# Altium PCB Sensorboard.PcbDoc
Units mm, origin at the board's own origin, x right, y up, seen from the top; angles counter-clockwise.
Board outline 131 x 56 mm, 2 copper layers (Top Layer, Bottom Layer), stack 1.671 mm thick; 160 components, 86 nets, 430 pads, 72 vias.
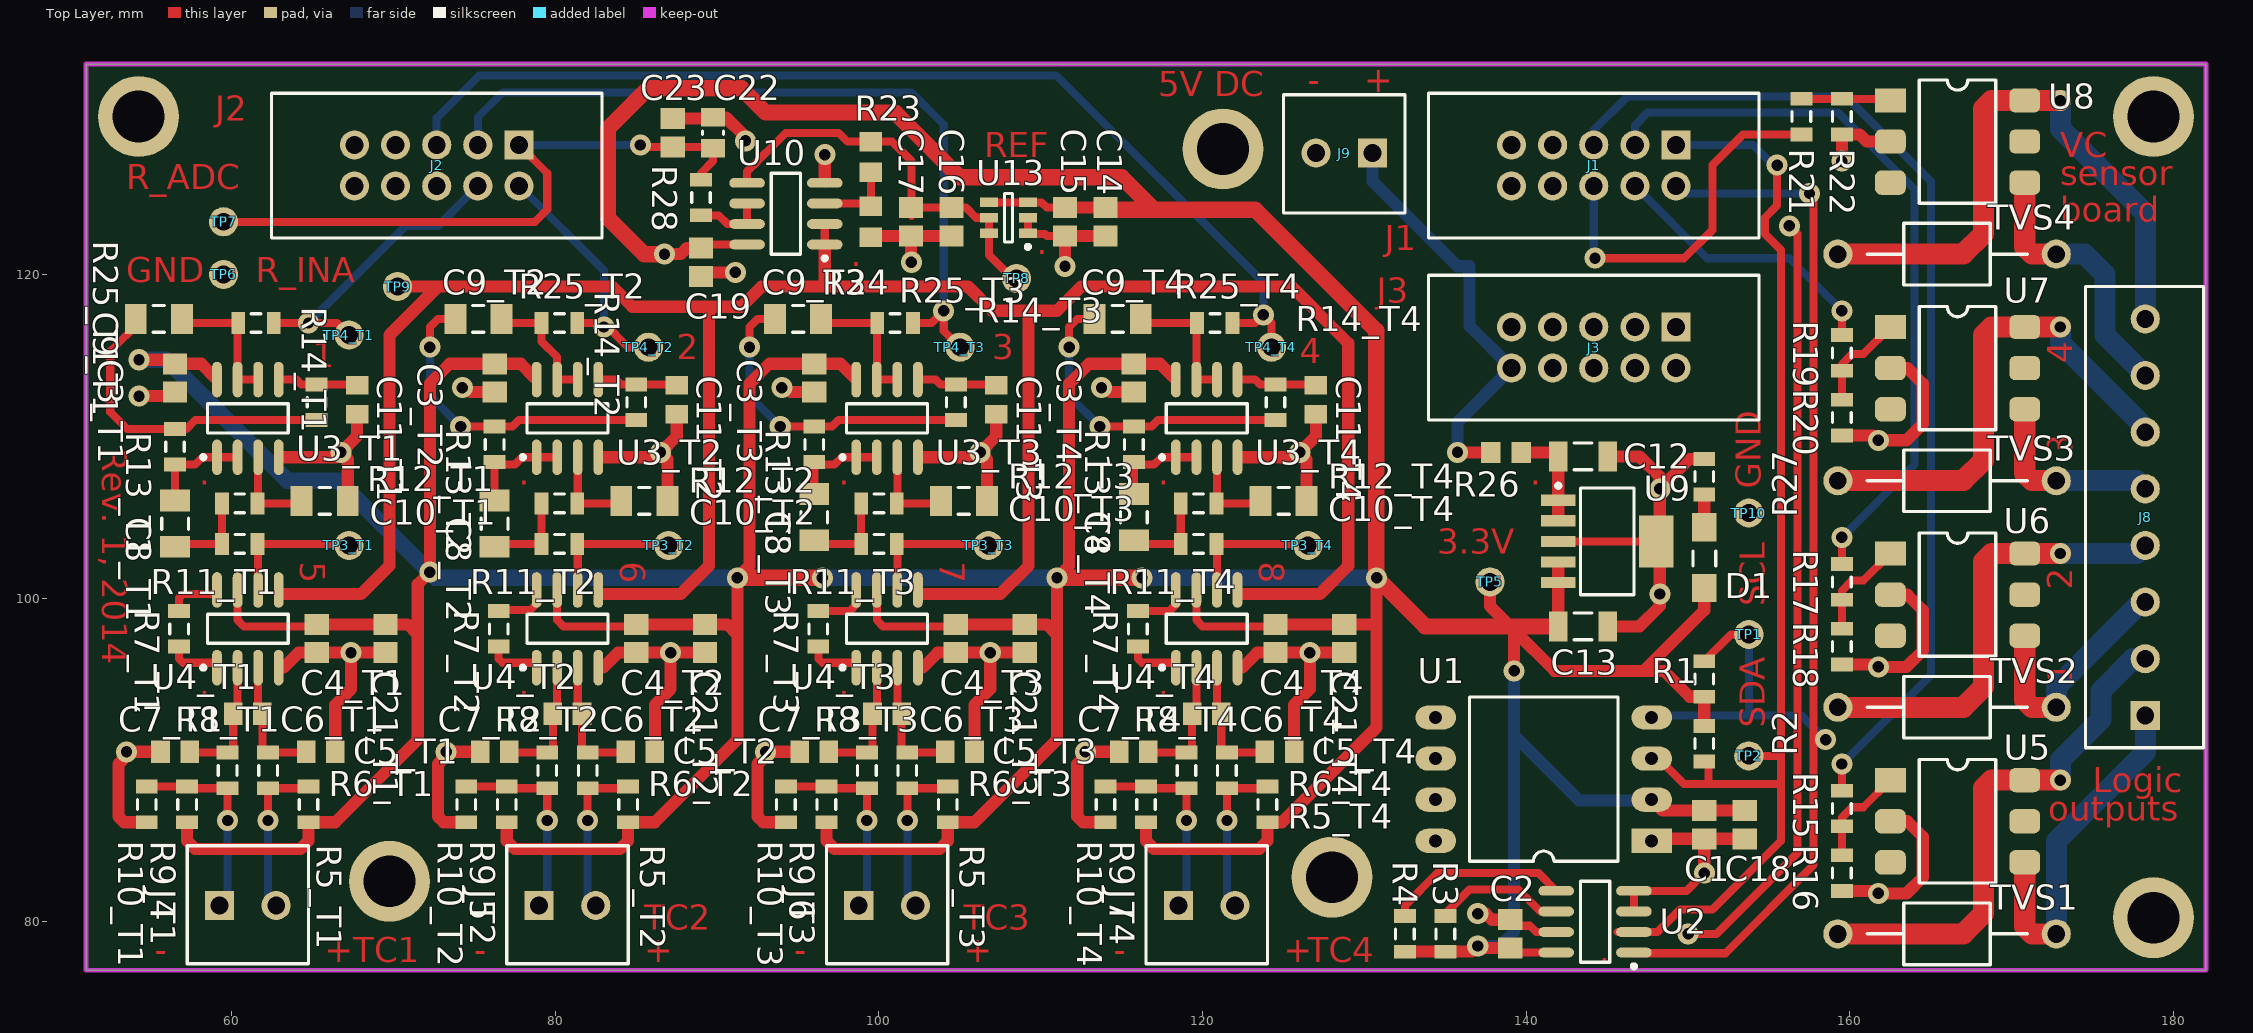
[diagram p0: Top Layer view]
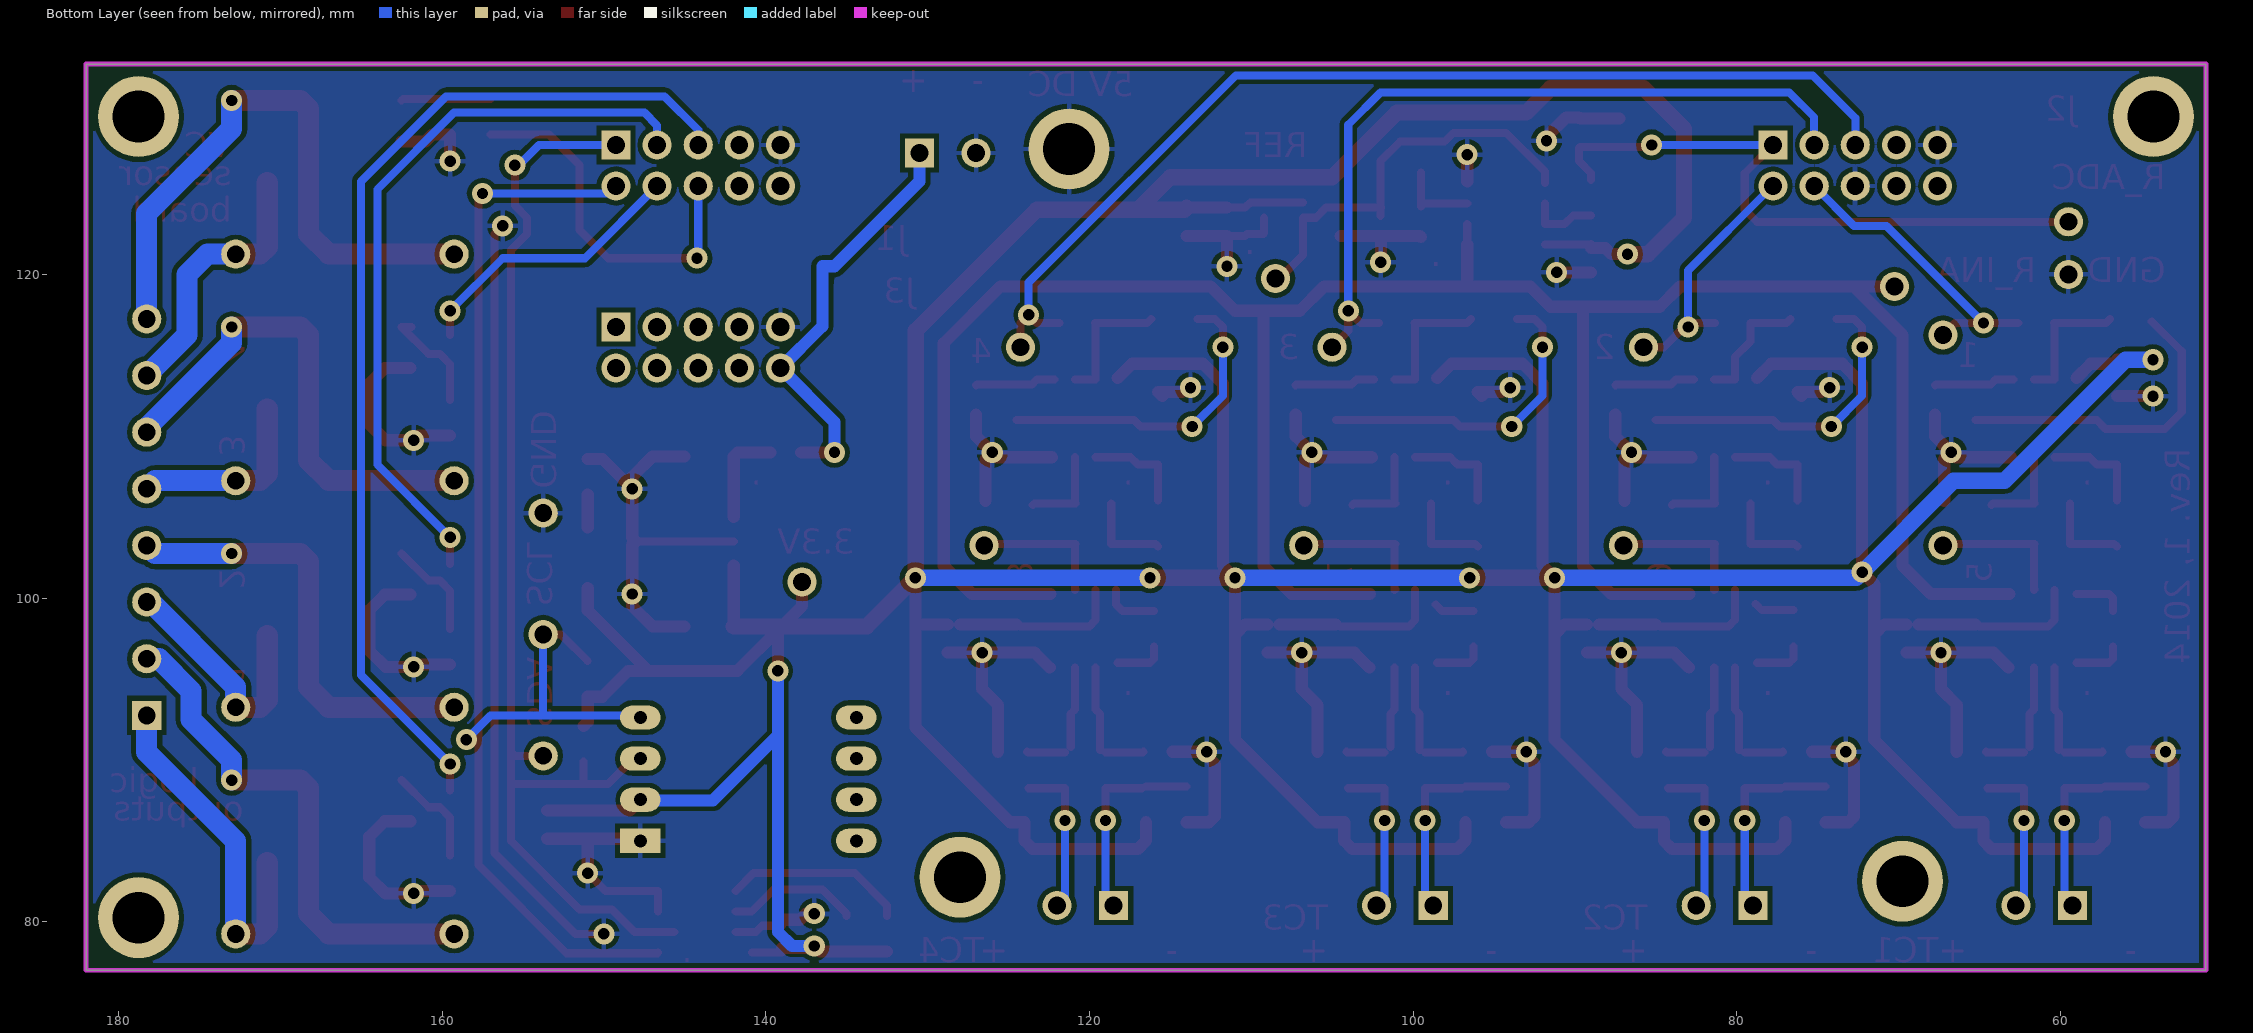
[diagram p1: Bottom Layer view, seen from below]

## Layer stack, top to bottom
Top Solder: solder mask 0.0102, Solder Resist, Dk 3.5
Top Layer: signal copper 0.0356
Dielectric 1: dielectric 1.6, FR-4, Dk 4.8
Bottom Layer: signal copper 0.0356
Bottom Solder: solder mask 0.0102, Solder Resist, Dk 3.5

## Board outline
51,77 51,133 182,133 182,77

## Design rules (kind name [scope] priority, off if disabled: settings)
Clearance "Groundplane clearance" [InNamedPolygon('Bottom Layer-GND')] p1: gap=0.3
Clearance "General clearance" [All] p2: gap=0.3
ComponentClearance ComponentClearance_2 [(InComponent('TP1') OR InComponent('TP2') OR InComponent('TP3_T1') OR InComponent('TP3_T2') OR InComponent('TP3_T3') OR InComponent('TP3_T4') OR InComponent('TP4_T1') OR InComponent('TP4_T2') OR InComponent('TP4_T3') OR InComponent('TP4_T4') OR InComponent('TP5') OR InComponent('TP6') OR InComponent('TP7') OR InComponent('TP8') OR InComponent('TP9') OR InComponent('TP10'))] p1: gap=0.5 collisioncheckmode=3 verticalgap=0.254 showdistances=FALSE
ComponentClearance [(InComponent('TVS1') OR InComponent('TVS2') OR InComponent('TVS3') OR InComponent('TVS4'))] p2: gap=0.1 collisioncheckmode=3 verticalgap=0.254 showdistances=FALSE
ComponentClearance ComponentClearance_1 [All] p3: gap=1 collisioncheckmode=3 verticalgap=0.254 showdistances=FALSE
HoleSize [All] p1: absolutevalues=TRUE maxlimit=3.2 minlimit=0.025 maxpercent=80.000 minpercent=20.000
PolygonConnect PolygonConnect_1 [All vs IsNamedPolygon('Bottom Layer-GND')] p1: connectstyle=Relief reliefconductorwidth=0.3 reliefentries=4 polygonreliefangle="90 Angle" airgapwidth=0.3
RoomDefinition T2 [(InComponentClass('T2') OR InComponent('J5'))] p1: confinementstyle=ConfineIn formatcopy=TRUE lockcomponents=FALSE outline 71.75,76.25 91.5,76.25 91.5,123.5 71.75,123.5
RoomDefinition T4 [(InComponentClass('T4') OR InComponent('J7'))] p2: confinementstyle=ConfineIn formatcopy=TRUE lockcomponents=FALSE outline 111.25,76.25 131,76.25 131,123.5 111.25,123.5
RoomDefinition T3 [(InComponentClass('T3') OR InComponent('J6'))] p3: confinementstyle=ConfineIn formatcopy=TRUE lockcomponents=FALSE outline 91.5,76.25 111.25,76.25 111.25,123.5 91.5,123.5
RoomDefinition T1 [(InComponentClass('T1') OR InComponent('J4'))] p4: confinementstyle=ConfineIn formatcopy=TRUE lockcomponents=FALSE outline 52,76.25 71.75,76.25 71.75,123.5 52,123.5
RoutingVias [All] p1: holewidth=0.7 width=1.3 viastyle="Through Hole" minholewidth=0.7 minwidth=1.3 maxholewidth=0.7 maxwidth=1.3
SolderMaskExpansion [All] p1: expansion=0.102
Width [All] p1: maxlimit=1.3 minlimit=0.5 preferedwidth=0.5 minimp=50.000000 maximp=50.000000 favimp=50.000000
27 further rules are at their usual default settings.

## Classes and differential pairs
channel class Temperature_Measurement: T1 T2 T3 T4
net class TEMP[1..4]: TEMP1 TEMP2 TEMP3 TEMP4
net class TC-[1..4]: TC-1 TC-2 TC-3 TC-4
net class TC+[1..4]: TC+1 TC+2 TC+3 TC+4
net class OUTC[1..4]: OUTC1 OUTC2 OUTC3 OUTC4
net class OUT-[1..4]: OUT-1 OUT-2 OUT-3 OUT-4
net class OUT+[1..4]: OUT+1 OUT+2 OUT+3 OUT+4
component class Xplained_Interface: J1 J2 J3 X2 X3 X4 X5 X6 X7
component class toplevel: J4 J5 J6 J7 J8 J9 X1
component class T4: C3_T4 C4_T4 C5_T4 C6_T4 C7_T4 C8_T4 C9_T4 C10_T4 C11_T4 C21_T4 R5_T4 R6_T4 R7_T4 R8_T4 R9_T4 R10_T4 R11_T4 R12_T4 R13_T4 R14_T4 R25_T4 TP3_T4 TP4_T4 U3_T4 U4_T4
component class T3: C3_T3 C4_T3 C5_T3 C6_T3 C7_T3 C8_T3 C9_T3 C10_T3 C11_T3 C21_T3 R5_T3 R6_T3 R7_T3 R8_T3 R9_T3 R10_T3 R11_T3 R12_T3 R13_T3 R14_T3 R25_T3 TP3_T3 TP4_T3 U3_T3 U4_T3
component class T2: C3_T2 C4_T2 C5_T2 C6_T2 C7_T2 C8_T2 C9_T2 C10_T2 C11_T2 C21_T2 R5_T2 R6_T2 R7_T2 R8_T2 R9_T2 R10_T2 R11_T2 R12_T2 R13_T2 R14_T2 R25_T2 TP3_T2 TP4_T2 U3_T2 U4_T2
component class T1: 3 C3_T1 C4_T1 C5_T1 C6_T1 C7_T1 C8_T1 C9_T1 C10_T1 C11_T1 C21_T1 R5_T1 R6_T1 R7_T1 R8_T1 R9_T1 R10_T1 R11_T1 R12_T1 R13_T1 R14_T1 R25_T1 TP3_T1 TP4_T1 U3_T1 U4_T1
component class Pressure_and_local_temp: C1 C2 C18 R1 R2 R3 R4 TP1 TP2 TP10 U1 U2
component class Power_System: C12 C13 C14 C15 C16 C17 C19 C22 C23 D1 R23 R24 R26 R27 R28 TP5 TP6 TP7 TP8 TP9 U9 U10 U13
component class Logic_Outputs: R15 R16 R17 R18 R19 R20 R21 R22 TVS1 TVS2 TVS3 TVS4 U5 U6 U7 U8

## Components (designator, comment, footprint, x,y, rotation, side; value= is the part's Value field where it differs from the comment)
C1 "C0805C104K5RACTU" "Cap Kemet 0805" 151,86 r90 top
C2 "C0805C104K5RACTU" "Cap Kemet 0805" 139,79.25 r270 top
C3_T1 "C0805C104K5RACTU" "Cap Kemet 0805" 56.5,113.6 r90 top (schematic designator C3)
C3_T2 "C0805C104K5RACTU" "Cap Kemet 0805" 76.25,113.6 r90 top (schematic designator C3)
C3_T3 "C0805C104K5RACTU" "Cap Kemet 0805" 96,113.6 r90 top (schematic designator C3)
C3_T4 "C0805C104K5RACTU" "Cap Kemet 0805" 115.75,113.6 r90 top (schematic designator C3)
C4_T1 "C0805C104K5RACTU" "Cap Kemet 0805" 65.25,97.5 r90 top (schematic designator C4)
C4_T2 "C0805C104K5RACTU" "Cap Kemet 0805" 85,97.5 r90 top (schematic designator C4)
C4_T3 "C0805C104K5RACTU" "Cap Kemet 0805" 104.75,97.5 r90 top (schematic designator C4)
C4_T4 "C0805C104K5RACTU" "Cap Kemet 0805" 124.5,97.5 r90 top (schematic designator C4)
C5_T1 "GRM2165C1H102JA01D" "CAP0805 murata" 65.5,90.5 r0 top (schematic designator C5)
C5_T2 "GRM2165C1H102JA01D" "CAP0805 murata" 85.25,90.5 r0 top (schematic designator C5)
C5_T3 "GRM2165C1H102JA01D" "CAP0805 murata" 105,90.5 r0 top (schematic designator C5)
C5_T4 "GRM2165C1H102JA01D" "CAP0805 murata" 124.75,90.5 r0 top (schematic designator C5)
C6_T1 "GRM21B5C1H223JA01L" "CAP0805 murata" 61,92.85 r0 top (schematic designator C6)
C6_T2 "GRM21B5C1H223JA01L" "CAP0805 murata" 80.75,92.85 r0 top (schematic designator C6)
C6_T3 "GRM21B5C1H223JA01L" "CAP0805 murata" 100.5,92.85 r0 top (schematic designator C6)
C6_T4 "GRM21B5C1H223JA01L" "CAP0805 murata" 120.25,92.85 r0 top (schematic designator C6)
C7_T1 "GRM2165C1H102JA01D" "CAP0805 murata" 56.5,90.5 r0 top (schematic designator C7)
C7_T2 "GRM2165C1H102JA01D" "CAP0805 murata" 76.25,90.5 r0 top (schematic designator C7)
C7_T3 "GRM2165C1H102JA01D" "CAP0805 murata" 96,90.5 r0 top (schematic designator C7)
C7_T4 "GRM2165C1H102JA01D" "CAP0805 murata" 115.75,90.5 r0 top (schematic designator C7)
C8_T1 "GRM31C5C1E104JA01L" "Cap1206 Murata" 56.5,104.6 r270 top (schematic designator C8)
C8_T2 "GRM31C5C1E104JA01L" "Cap1206 Murata" 76.25,104.6 r270 top (schematic designator C8)
C8_T3 "GRM31C5C1E104JA01L" "Cap1206 Murata" 96,105 r270 top (schematic designator C8)
C8_T4 "GRM31C5C1E104JA01L" "Cap1206 Murata" 115.75,105 r270 top (schematic designator C8)
C9_T1 "GRM31C5C1E104JA01L" "Cap1206 Murata" 55.5,117.25 r180 top (schematic designator C9)
C9_T2 "GRM31C5C1E104JA01L" "Cap1206 Murata" 75.25,117.25 r180 top (schematic designator C9)
C9_T3 "GRM31C5C1E104JA01L" "Cap1206 Murata" 95,117.25 r180 top (schematic designator C9)
C9_T4 "GRM31C5C1E104JA01L" "Cap1206 Murata" 114.75,117.25 r180 top (schematic designator C9)
C10_T1 "GRM31C5C1H823GA01L" "Cap1206 Murata" 65.75,106 r180 top (schematic designator C10)
C10_T2 "GRM31C5C1H823GA01L" "Cap1206 Murata" 85.5,106 r180 top (schematic designator C10)
C10_T3 "GRM31C5C1H823GA01L" "Cap1206 Murata" 105.25,106 r180 top (schematic designator C10)
C10_T4 "GRM31C5C1H823GA01L" "Cap1206 Murata" 125,106 r180 top (schematic designator C10)
C11_T1 "GRM2195C1H123JA01D" "CAP0805 murata" 67.75,112.25 r90 top (schematic designator C11)
C11_T2 "GRM2195C1H123JA01D" "CAP0805 murata" 87.5,112.25 r90 top (schematic designator C11)
C11_T3 "GRM2195C1H123JA01D" "CAP0805 murata" 107.25,112.25 r90 top (schematic designator C11)
C11_T4 "GRM2195C1H123JA01D" "CAP0805 murata" 127,112.25 r90 top (schematic designator C11)
C12 "C3216X7R1C106K160AC" "Cap TDK1206" 143.5,108.75 r180 top
C13 "C3216X7R1C106K160AC" "Cap TDK1206" 143.5,98.25 r180 top
C14 "C0805C105K4RACTU" "Cap Kemet 0805" 114,123.25 r90 top
C15 "C0805C104K5RACTU" "Cap Kemet 0805" 111.5,123.25 r90 top
C16 "C0805C104K5RACTU" "Cap Kemet 0805" 104.475,123.25 r90 top
C17 "C0805C105K4RACTU" "Cap Kemet 0805" 101.975,123.25 r90 top
C18 "C0805C105K4RACTU" "Cap Kemet 0805" 153.5,86 r90 top
C19 "C0805C104K5RACTU" "Cap Kemet 0805" 89,120.75 r90 top
C21_T1 "C0805C105K4RACTU" "Cap Kemet 0805" 69.5,97.5 r90 top (schematic designator C21)
C21_T2 "C0805C105K4RACTU" "Cap Kemet 0805" 89.25,97.5 r90 top (schematic designator C21)
C21_T3 "C0805C105K4RACTU" "Cap Kemet 0805" 109,97.5 r90 top (schematic designator C21)
C21_T4 "C0805C105K4RACTU" "Cap Kemet 0805" 128.75,97.5 r90 top (schematic designator C21)
C22 "C2012X7R1A475K125AC" "Cap TDK0805" 89.75,128.75 r270 top
C23 "C0805C104K5RACTU" "Cap Kemet 0805" 87.25,128.75 r270 top
D1 "KP-3216CGCK" "Diode Kingbright" 151,102.5 r90 top
J1 "T821110A1S100CEU" "Header 10P" 149.25,128 r270 top
J2 "T821110A1S100CEU" "Header 10P" 77.75,128 r270 top
J3 "T821110A1S100CEU" "Header 10P" 149.25,116.75 r270 top
J4 "1751248" "Terminalblock Pheonix 2P" 59.25,81 r90 top
J5 "1751248" "Terminalblock Pheonix 2P" 79,81 r90 top
J6 "1751248" "Terminalblock Pheonix 2P" 98.75,81 r90 top
J7 "1751248" "Terminalblock Pheonix 2P" 118.5,81 r90 top
J8 "1751303" "TERMINALBLOCK pheonix 8p" 178.25,92.75 r180 top
J9 "1751248" "Terminalblock Pheonix 2P" 130.5,127.5 r270 top
R1 "CRCW08054K70FKEB" "Res Vishay0805" 151,95 r270 top
R2 "CRCW08054K70FKEB" "Res Vishay0805" 151,91 r90 top
R3 "CRCW080510K0FKEB" "Res Vishay0805" 135,79.25 r270 top
R4 "CRCW080510K0FKEB" "Res Vishay0805" 132.5,79.25 r270 top
R5_T1 "CRCW080510M0FKEA" "Res Vishay0805" 64.75,87.25 r270 top (schematic designator R5)
R5_T2 "CRCW080510M0FKEA" "Res Vishay0805" 84.5,87.25 r270 top (schematic designator R5)
R5_T3 "CRCW080510M0FKEA" "Res Vishay0805" 104.25,87.25 r270 top (schematic designator R5)
R5_T4 "CRCW080510M0FKEA" "Res Vishay0805" 124,87.25 r270 top (schematic designator R5)
R6_T1 "CRCW080510K0FKEB" "Res Vishay0805" 62.25,89.35 r90 top (schematic designator R6)
R6_T2 "CRCW080510K0FKEB" "Res Vishay0805" 82,89.35 r90 top (schematic designator R6)
R6_T3 "CRCW080510K0FKEB" "Res Vishay0805" 101.75,89.35 r90 top (schematic designator R6)
R6_T4 "CRCW080510K0FKEB" "Res Vishay0805" 121.5,89.35 r90 top (schematic designator R6)
R7_T1 "CRCW0805442RFKEA" "Res Vishay0805" 56.75,98.1 r90 top (schematic designator R7)
R7_T2 "CRCW0805442RFKEA" "Res Vishay0805" 76.5,98.1 r90 top (schematic designator R7)
R7_T3 "CRCW0805442RFKEA" "Res Vishay0805" 96.25,98.1 r90 top (schematic designator R7)
R7_T4 "CRCW0805442RFKEA" "Res Vishay0805" 116,98.1 r90 top (schematic designator R7)
R8_T1 "CRCW080510K0FKEB" "Res Vishay0805" 59.75,89.35 r90 top (schematic designator R8)
R8_T2 "CRCW080510K0FKEB" "Res Vishay0805" 79.5,89.35 r90 top (schematic designator R8)
R8_T3 "CRCW080510K0FKEB" "Res Vishay0805" 99.25,89.35 r90 top (schematic designator R8)
R8_T4 "CRCW080510K0FKEB" "Res Vishay0805" 119,89.35 r90 top (schematic designator R8)
R9_T1 "CRCW080522K6FKEA" "Res Vishay0805" 57.25,87.25 r270 top (schematic designator R9)
R9_T2 "CRCW080522K6FKEA" "Res Vishay0805" 77,87.25 r270 top (schematic designator R9)
R9_T3 "CRCW080522K6FKEA" "Res Vishay0805" 96.75,87.25 r270 top (schematic designator R9)
R9_T4 "CRCW080522K6FKEA" "Res Vishay0805" 116.5,87.25 r270 top (schematic designator R9)
R10_T1 "CRCW080510K0FKEB" "Res Vishay0805" 54.75,87.25 r90 top (schematic designator R10)
R10_T2 "CRCW080510K0FKEB" "Res Vishay0805" 74.5,87.25 r90 top (schematic designator R10)
R10_T3 "CRCW080510K0FKEB" "Res Vishay0805" 94.25,87.25 r90 top (schematic designator R10)
R10_T4 "CRCW080510K0FKEB" "Res Vishay0805" 114,87.25 r90 top (schematic designator R10)
R11_T1 "CRCW0805133KFKEA" "Res Vishay0805" 60.5,103.35 r180 top (schematic designator R11)
R11_T2 "CRCW0805133KFKEA" "Res Vishay0805" 80.25,103.35 r180 top (schematic designator R11)
R11_T3 "CRCW0805133KFKEA" "Res Vishay0805" 100,103.35 r180 top (schematic designator R11)
R11_T4 "CRCW0805133KFKEA" "Res Vishay0805" 119.75,103.35 r180 top (schematic designator R11)
R12_T1 "CRCW0805215KFKEA" "Res Vishay0805" 60.5,105.85 r0 top (schematic designator R12)
R12_T2 "CRCW0805215KFKEA" "Res Vishay0805" 80.25,105.85 r0 top (schematic designator R12)
R12_T3 "CRCW0805215KFKEA" "Res Vishay0805" 100,105.85 r0 top (schematic designator R12)
R12_T4 "CRCW0805215KFKEA" "Res Vishay0805" 119.75,105.85 r0 top (schematic designator R12)
R13_T1 "CRCW0805294KFKEA" "Res Vishay0805" 56.5,109.35 r90 top (schematic designator R13)
R13_T2 "CRCW0805294KFKEA" "Res Vishay0805" 76.25,109.5 r90 top (schematic designator R13)
R13_T3 "CRCW0805294KFKEA" "Res Vishay0805" 96,109.5 r90 top (schematic designator R13)
R13_T4 "CRCW0805294KFKEA" "Res Vishay0805" 115.75,109.5 r90 top (schematic designator R13)
R14_T1 "CRCW0805715KFKEA" "Res Vishay0805" 65.25,112.1 r90 top (schematic designator R14)
R14_T2 "CRCW0805715KFKEA" "Res Vishay0805" 85,112.1 r90 top (schematic designator R14)
R14_T3 "CRCW0805715KFKEA" "Res Vishay0805" 104.75,112.1 r90 top (schematic designator R14)
R14_T4 "CRCW0805715KFKEA" "Res Vishay0805" 124.5,112.1 r90 top (schematic designator R14)
R15 "CRCW0805300RFKEA" "Res Vishay0805" 159.5,87 r270 top
R16 "CRCW080510K0FKEB" "Res Vishay0805" 159.5,83 r90 top
R17 "CRCW0805300RFKEA" "Res Vishay0805" 159.5,101 r270 top
R18 "CRCW080510K0FKEB" "Res Vishay0805" 159.5,97 r90 top
R19 "CRCW0805300RFKEA" "Res Vishay0805" 159.5,115.15 r270 top
R20 "CRCW080510K0FKEB" "Res Vishay0805" 159.5,111.15 r90 top
R21 "CRCW0805300RFKEA" "Res Vishay0805" 157,129.75 r90 top
R22 "CRCW080510K0FKEB" "Res Vishay0805" 159.5,129.75 r90 top
R23 "RG2012P-4022-B-T5" "RES SSM 0805" 99.5,127.25 r90 top
R24 "RG2012P-103-B-T5" "RES SSM 0805" 99.5,123.25 r90 top
R25_T1 "CRCW08050000Z0EA" "Res Vishay0805" 61.5,117 r0 top (schematic designator R25)
R25_T2 "CRCW08050000Z0EA" "Res Vishay0805" 80.25,117 r0 top (schematic designator R25)
R25_T3 "CRCW08050000Z0EA" "Res Vishay0805" 101,117 r0 top (schematic designator R25)
R25_T4 "CRCW08050000Z0EA" "Res Vishay0805" 120.75,117 r0 top (schematic designator R25)
R26 "ERJ-6RSFR10V" "Res panasonic0805" 138.75,109 r0 top
R27 "CRCW0805220RFKEA" "Res Vishay0805" 151,107.5 r270 top
R28 "CRCW080520R0FKEA" "Res Vishay0805" 89,124.75 r90 top
TP1 "Test_point" Testpoint 153.75,97.75 r0 top
TP2 "Test_point" Testpoint 153.75,90.25 r90 top
TP3_T1 "Test_point" Testpoint 67.25,103.25 r90 top (schematic designator TP3)
TP3_T2 "Test_point" Testpoint 87,103.25 r90 top (schematic designator TP3)
TP3_T3 "Test_point" Testpoint 106.75,103.25 r90 top (schematic designator TP3)
TP3_T4 "Test_point" Testpoint 126.5,103.25 r90 top (schematic designator TP3)
TP4_T1 "Test_point" Testpoint 67.25,116.25 r90 top (schematic designator TP4)
TP4_T2 "Test_point" Testpoint 85.75,115.5 r90 top (schematic designator TP4)
TP4_T3 "Test_point" Testpoint 105,115.5 r90 top (schematic designator TP4)
TP4_T4 "Test_point" Testpoint 124.25,115.5 r90 top (schematic designator TP4)
TP5 "Test_point" Testpoint 137.75,101 r90 top
TP6 "Test_point" Testpoint 59.5,120 r90 top
TP7 "Test_point" Testpoint 59.5,123.25 r90 top
TP8 "Test_point" Testpoint 108.5,119.75 r90 top
TP9 "Test_point" Testpoint 70.25,119.25 r90 top
TP10 "Test_point" Testpoint 153.75,105.25 r90 top
TVS1 "SA36CA-E3/54" "Diode Vishay" 159.25,79.25 r0 top
TVS2 "SA36CA-E3/54" "Diode Vishay" 159.25,93.25 r0 top
TVS3 "SA36CA-E3/54" "Diode Vishay" 159.25,107.25 r0 top
TVS4 "SA36CA-E3/54" "Diode Vishay" 159.25,121.25 r0 top
U1 "HSCDANN015PA2A3" "HSCDANN015PA2A3 Pressure sensor" 147.75,85 r180 top
U2 "ADT7410TRZ" ADT7410 144.25,80 r180 top
U3_T1 "LMP7702MA/NOPB" OPA2333AIDR 61,111.1 r90 top (schematic designator U3)
U3_T2 "LMP7702MA/NOPB" OPA2333AIDR 80.75,111.1 r90 top (schematic designator U3)
U3_T3 "LMP7702MA/NOPB" OPA2333AIDR 100.5,111.1 r90 top (schematic designator U3)
U3_T4 "LMP7702MA/NOPB" OPA2333AIDR 120.25,111.1 r90 top (schematic designator U3)
U4_T1 "AD623BRZ" AD623 61,98.1 r90 top (schematic designator U4)
U4_T2 "AD623BRZ" AD623 80.75,98.1 r90 top (schematic designator U4)
U4_T3 "AD623BRZ" AD623 100.5,98.1 r90 top (schematic designator U4)
U4_T4 "AD623BRZ" AD623 120.25,98.1 r90 top (schematic designator U4)
U5 "AQV252GA" "AQV252GA Panasonic" 162.5,88.75 r0 top
U6 "AQV252GA" "AQV252GA Panasonic" 162.5,102.75 r0 top
U7 "AQV252GA" "AQV252GA Panasonic" 162.5,116.75 r0 top
U8 "AQV252GA" "AQV252GA Panasonic" 162.5,130.75 r0 top
U9 "TPS7A4533DCQ" TPS7A4533DCQ 145,103.5 r0 top
U10 "LMP7702MA/NOPB" OPA2333AIDR 94.25,123.75 r180 top
U13 "ADR3425ARJZ" ADR3425 108,123.5 r180 top

## Footprints (in the part's own frame and the unit in brackets; to place one, negate y for a bottom-side part, rotate by r counter-clockwise, add the part's x,y. Pads: shape width x height; smd on the part's side, far side on the other; paste and mask are expansions set on the pad)
AD623 [mm] "SOIC, 8-Leads, Body 4,90x3,90mm, Pitch 1,27mm, IPC Medium Density"
  oval 2.2x0.6 smd: 1(-2.4,1.905) 2(-2.4,0.635) 3(-2.4,-0.635) 4(-2.4,-1.905) 5(2.4,-1.905) 6(2.4,-0.635) 7(2.4,0.635) 8(2.4,1.905)
  silkscreen extent -2.52,-2.5 0.9,2.88, body extent -2,-2.5 2,2.5, height 1.75
ADR3425 [mm] "SOT23, 6-Leads, Body 2,90x2,80mm, Pitch 0,95mm, IPC Medium Density"
  rect 1.1x0.6 smd: 1(-1.2,0.95) 2(-1.2,0) 3(-1.2,-0.95) 4(1.2,-0.95) 5(1.2,0) 6(1.2,0.95)
  silkscreen extent -1.33,-1.5 0.25,1.92, body extent -0.85,-1.5 0.85,1.5, height 1.45
ADT7410 [mm] "SOIC, Pitch = 1.27mm"
  oval 2.2x0.6 smd: 1(-2.4,1.905) 2(-2.4,0.635) 3(-2.4,-0.635) 4(-2.4,-1.905) 5(2.4,-1.905) 6(2.4,-0.635) 7(2.4,0.635) 8(2.4,1.905)
  silkscreen extent -2.53,-2.5 0.9,2.88, body extent -2,-2.5 2,2.5, height 1.75
"AQV252GA Panasonic" [mm]
  rect 1.9x1.5 smd: 1(0,0)
  rrect50% 1.9x1.5 smd: 2(0,-2.54) 3(0,-5.08) 4(8.3,-5.08) 5(8.3,-2.54) 6(8.3,0)
  silkscreen extent 1.78,-6.35 6.52,1.27
"CAP0805 murata" [mm] "Chip Capacitor, 2-Leads, Body 2,00x1,25mm, IPC Medium Density"
  rect 1.15x1.4 smd: 1(-0.9,0) 2(0.9,0)
  body extent -1.05,-0.67 1.05,0.67, height 0.7
"Cap1206 Murata" [mm]
  rect 1.35x1.85 smd: 1(-1.425,0) 2(1.425,0)
  silkscreen extent -0.35,-0.82 0.35,0.82, body extent -1.7,-0.9 1.7,0.9, height 1.8
"Cap Kemet 0805" [mm]
  rect 1.3x1.5 smd: 1(-0.875,0) 2(0.875,0)
  body extent -1.1,-0.72 1.1,0.72, height 0.88
"Cap TDK0805" [mm]
  rect 1.15x1.5 smd: 1(-0.95,0) 2(0.95,0)
  silkscreen extent -0.1,-0.65 0.1,0.65, body extent -1.1,-0.72 1.1,0.72, height 1.45
"Cap TDK1206" [mm]
  rect 1.15x1.85 smd: 1(-1.525,0) 2(1.525,0)
  silkscreen extent -0.55,-0.82 0.55,0.82, body extent -1.7,-0.9 1.7,0.9, height 1.8
"Diode Kingbright" [mm]
  rect 1.75x1.5 smd: A(-1.875,0) K(1.875,0)
  silkscreen extent -0.5,-0.7 0.4,0.7
"Diode Vishay" [mm]
  round 1.8 hole 1.1: A(0,0) K(13.5,0)
  silkscreen extent 1.8,-1.91 11.7,1.91
"Header 10P" [mm]
  rect 1.8x1.8 hole 1.1: 1(0,0)
  round 1.8 hole 1.1: 2(2.54,0) 3(0,-2.54) 4(2.54,-2.54) 5(0,-5.08) 6(2.54,-5.08) 7(0,-7.62) 8(2.54,-7.62) 9(0,-10.16) 10(2.54,-10.16)
  silkscreen extent -3.2,-15.29 5.74,5.13
"HSCDANN015PA2A3 Pressure sensor" [mm]
  rect 2.5x1.5 hole 0.8: 1(0,0)
  oval 2.5x1.5 hole 0.8: 2(0,-2.54) 3(0,-5.08) 4(0,-7.62) 5(13.35,-7.62) 6(13.35,-5.08) 7(13.35,-2.54) 8(13.35,0)
  silkscreen extent 2.08,-8.89 11.27,1.27
OPA2333AIDR [mm] "SOIC pitch=1.27mm"
  oval 2.2x0.6 smd: 1(-2.4,1.905) 2(-2.4,0.635) 3(-2.4,-0.635) 4(-2.4,-1.905) 5(2.4,-1.905) 6(2.4,-0.635) 7(2.4,0.635) 8(2.4,1.905)
  silkscreen extent -2.52,-2.5 0.9,2.88, body extent -2,-2.5 2,2.5, height 1.75
"Res panasonic0805" [mm]
  rect 1.2x1.3 smd: 1(-0.95,0) 2(0.95,0)
  body extent -1.1,-0.67 1.1,0.68, height 0.7
"RES SSM 0805" [mm]
  rect 1.2x1.4 smd: 1(-0.95,0) 2(0.95,0)
  body extent -1.1,-0.72 1.1,0.73, height 0.5
"Res Vishay0805" [mm]
  rect 0.85x1.35 smd: 1(-1.1,0) 2(1.1,0)
  silkscreen extent -0.3,-0.58 0.3,0.58, body extent -1.1,-0.7 1.1,0.7, height 0.5
"Terminalblock Pheonix 2P" [mm]
  rect 1.8x1.8 hole 1.1: 1(0,0)
  round 1.8 hole 1.1: 2(0,-3.5)
  silkscreen extent -3.6,-5.5 3.7,2
"TERMINALBLOCK pheonix 8p" [mm]
  rect 1.8x1.8 hole 1.1: 1(0,0)
  round 1.8 hole 1.1: 2(0,-3.5) 3(0,-7) 4(0,-10.5) 5(0,-14) 6(0,-17.5) 7(0,-21) 8(0,-24.5)
  silkscreen extent -3.6,-26.5 3.7,2
Testpoint [mm]
  round 1.8 hole 1.1: 1(0,0)
TPS7A4533DCQ [mm] "SOT223, 6-Leads, Body 6,50x7,06mm (avg), Pitch 1,27mm, IPC Medium Density"
  rect 2.15x0.7 smd: 1(-3.025,2.54) 2(-3.025,1.27) 3(-3.025,0) 4(-3.025,-1.27) 5(-3.025,-2.54)
  rect 2.15x3.2 smd: 6(3.025,0)
  silkscreen extent -3.15,-3.3 1.65,3.56, body extent -1.78,-3.27 1.78,3.27, height 1.8

## Part data
C1 C2 C3_T1 C3_T2 C3_T3 C3_T4 C4_T1 C4_T2 C4_T3 C4_T4 C15 C16 C19 C23: "Ceramic capacitor, X7R, 10%, 50V"
C5_T1 C5_T2 C5_T3 C5_T4 C6_T1 C6_T2 C6_T3 C6_T4 C7_T1 C7_T2 C7_T3 C7_T4 C11_T1 C11_T2 C11_T3 C11_T4: "Ceramic capacitor, C0G, 5%, 50V"
C8_T1 C8_T2 C8_T3 C8_T4 C9_T1 C9_T2 C9_T3 C9_T4: "Ceramic capacitor, C0G, 5%, 25V"
C10_T1 C10_T2 C10_T3 C10_T4: "Ceramic capacitor, C0G, 2%, 50V"
C12 C13 C14 C17 C18 C21_T1 C21_T2 C21_T3 C21_T4: "Ceramic capacitor, X7R, 10%, 16V"
C22: "Ceramic capacitor, X7R, 10%, 10V"
D1: "Chip led lamp,green, 50mcd @ 20mA"
J1 J2 J3: "Header, 2x5, 2.54mm"
J4 J5 J6 J7 J9: "Terminal block, 2P, 3.5mm, screw"
J8: "Terminal block, 8P, 3.5mm, screw"
R1 R2 R3 R4 R5_T1 R5_T2 R5_T3 R5_T4 R6_T1 R6_T2 R6_T3 R6_T4 R7_T1 R7_T2 R7_T3 R7_T4 R8_T1 R8_T2 R8_T3 R8_T4 R9_T1 R9_T2 R9_T3 R9_T4 R10_T1 R10_T2 R10_T3 R10_T4 R11_T1 R11_T2 R11_T3 R11_T4 R12_T1 R12_T2 R12_T3 R12_T4 R13_T1 R13_T2 R13_T3 R13_T4 R14_T1 R14_T2 R14_T3 R14_T4 R15 R16 R17 R18 R19 R20 R21 R22 R25_T1 R25_T2 R25_T3 R25_T4 R26 R27 R28: "Thick film resistor, 1%, 125mW"
R23 R24: "Thin film resistor, 0.1%, 100mW"
TVS1 TVS2 TVS3 TVS4: "TVS diode, bidirectional, 36 V"
U1: "Absolute pressure sensor, I2C output"
U2: "Temperature sensor, I2C output"
U3_T1 U3_T2 U3_T3 U3_T4 U10: "Op. amp, dual, rail-to-rail, single supply"
U4_T1 U4_T2 U4_T3 U4_T4: "Instrumentation amplifier, rail to rail"
U5 U6 U7 U8: "Solid state relay, DC/AC, 60V, 2.5A"
U9: "LDO regulator, 3.3V, 1.5A"
U13: "Series voltage reference, 2.5V"

## Free pads (board coordinates)
  round 5 hole 3.2: 0(54.25,129.75) 0(69.75,82.5) 0(121.25,127.75) 0(128,82.75) 0(178.75,80.25) 0(178.75,129.75)

## Via types
v1: diameter 1.3, hole 0.7, Top Layer to Bottom Layer, 72 vias

## Nets (pads, with @x,y where several pads share a name; then routed paths per layer and width w, separated by ;. In a path a pad name is that pad's centre, name@x,y a point inside that pad or via, vN(x,y) a via of type N, cw(c..) or ccw(c..) an arc to the next point about the centre after c; other vN are vias at no path point)
3.3V: C1.2 C2.2 C3_T1.2 C3_T2.2 C3_T3.2 C3_T4.2 C4_T1.2 C4_T2.2 C4_T3.2 C4_T4.2 C13.2 C14.2 C15.2 C18.2 C19.2 C21_T1.2 C21_T2.2 C21_T3.2 C21_T4.2 D1.A R1.2 R2.2 R3.2 R4.2 R5_T1.2 R5_T2.2 R5_T3.2 R5_T4.2 R9_T1.2 R9_T2.2 R9_T3.2 R9_T4.2 TP5.1 U1.2 U2.8 U3_T1.8 U3_T2.8 U3_T3.8 U3_T4.8 U4_T1.7 U4_T2.7 U4_T3.7 U4_T4.7 U9.4 U9.5 U10.8 U13.3 U13.4 | length 495.8
  Top Layer w0.5: U4_T1.7 60.365,98.635 60.75,98.25 C4_T1.2@65,98.25 ; U4_T2.7 80.115,98.635 80.5,98.25 C4_T2.2@84.75,98.25 ; C19.2@89,121.875 89.03,121.845 U10.8 ; U4_T3.7 99.865,98.635 100.25,98.25 C4_T3.2@104.5,98.25 ; U13.4 U13.3 110.05,124.45 110.375,124.125 C15.2 ; U4_T4.7 119.615,98.635 120,98.25 C4_T4.2@124.25,98.25 ; C2.2@139,78.095 U2.8@140.85,78.095 ; 140,98.25 140.25,98.25
  Top Layer w0.75: v1(54.275,114.725) C3_T1.2@56.5,114.725 ; C3_T1.2@56.775,114.5 C3_T1.2 58.12,114.475 U3_T1.8@59,113.595 ; R9_T1.2 57.25,85 57.75,84.5 64.25,84.5 64.75,85 R5_T1.2 66.4,86.15 71.5,91.25 71.5,97.75 ; C4_T1.2 68.75,98.375 ; C21_T1.2 70.875,98.375 71.5,97.75 ; R9_T2.2 77,85 77.5,84.5 84,84.5 84.5,85 R5_T2.2 86.15,86.15 91.25,91.25 91.25,97.75 ; U3_T2.8@78.75,113.595 77.87,114.475 C3_T2.2 73.475,114.475 72.25,113.25 v1(72.25,101.6) 71.5,100.85 71.5,97.75 ; C4_T2.2 88.5,98.375 ; v1(86.75,121.25) 87.75,121.25 88.125,121.625 C19.2 ; C21_T2.2 90.625,98.375 91.25,97.75 ; R9_T3.2 96.75,85 97.25,84.5 103.75,84.5 104.25,85 R5_T3.2 105.9,86.15 111,91.25 111,97.75 ; U3_T3.8@98.5,113.595 97.62,114.475 C3_T3.2 93.225,114.475 92,113.25 92,102 v1(91.25,101.25) 91.25,97.75 ; C4_T3.2 108.25,98.375 ; C21_T3.2 110.375,98.375 111,97.75 ; C15.2 C14.2 ; R9_T4.2 116.5,85 117,84.5 123.5,84.5 124,85 R5_T4.2 124.9,86.15 130.75,92 130.75,98.5 ; U3_T4.8@118.25,113.595 117.37,114.475 C3_T4.2 112.975,114.475 111.75,113.25 111.75,102 v1(111,101.25) 111,97.75 ; C4_T4.2 128,98.375 ; C21_T4.2 130.625,98.375 130.75,98.5 ; v1(130.75,101.25) 130.75,98.5 ; R4.2 R3.2 136.65,78.15 v1(137,78.5) 137.125,78.375 C2.2 ; TP5.1 137.75,99.5 139,98.25 139.25,98 ; v1(139.25,95.5) 139.25,98 ; C13.2 U9.5 U9.4@141.975,102 ; U1.2 148.415,86.875 C1.2 C18.2 ; D1.A 151,99.25 147.25,95.5 ; R2.2@151.25,92.1 151,92.35 R1.2 150.1,93.9 148.5,95.5 147.25,95.5 ; 139.25,98 141.75,95.5 147.25,95.5
  Top Layer w1: v1(86.75,121.25) 85.5,121.25 83.25,123.5 83.25,129 85.75,131.5 91.5,131.5 93,130 101,130 105,126 115,126 117,124 ; v1(91.25,101.25) v1(96.5,101.25) ; v1(111,101.25) v1(116.25,101.25) ; C14.2 114.125,124 117,124 ; C13.2 140.25,98.25 140,98.25 139,98.25 133.75,98.25 v1(130.75,101.25) 130.725,101.275 130.725,116.525 123.25,124 117,124
  Bottom Layer w0.75: v1(72.25,101.6) v1@72.35,101.5 ; v1@137,78.25 v1(137,78.5) 138.375,78.5 139.25,79.375 139.25,91.5 ; v1(139.25,95.5) 139.25,91.5 ; U1.2@147.75,87.29 147.54,87.5 143.25,87.5 139.25,91.5
  Bottom Layer w1: v1(54.275,114.725) 55.975,114.725 63.45,107.25 66.6,107.25 v1(72.25,101.6) ; v1@72.35,101.5 72.6,101.25 v1(91.25,101.25) ; v1(96.5,101.25) v1(111,101.25) ; v1(116.25,101.25) v1(130.75,101.25)
GND: C1.1 C2.1 C3_T1.1 C3_T2.1 C3_T3.1 C3_T4.1 C4_T1.1 C4_T2.1 C4_T3.1 C4_T4.1 C5_T1.2 C5_T2.2 C5_T3.2 C5_T4.2 C7_T1.1 C7_T2.1 C7_T3.1 C7_T4.1 C10_T1.1 C10_T2.1 C10_T3.1 C10_T4.1 C11_T1.1 C11_T2.1 C11_T3.1 C11_T4.1 C12.1 C13.1 C14.1 C15.1 C16.1 C17.1 C18.1 C19.1 C21_T1.1 C21_T2.1 C21_T3.1 C21_T4.1 C22.1 C23.1 J1.9 J2.6 J2.9 J3.9 J9.2 pad.0@121.25,127.75 R10_T1.1 R10_T2.1 R10_T3.1 R10_T4.1 R16.1 R18.1 R20.1 R22.1 R24.1 R27.1 TP6.1 TP10.1 U1.1 U2.3 U2.4 U2.7 U3_T1.4 U3_T2.4 U3_T3.4 U3_T4.4 U4_T1.4 U4_T2.4 U4_T3.4 U4_T4.4 U5.2 U6.2 U7.2 U8.2 U9.3 U9.6 U10.4 U13.1 U13.2 | length 284.6
  Top Layer w0.5: U13.2 U13.1 109.25,122.5 110.25,122.5 110.375,122.375 C15.1 ; C2.1@139,79.75 140.23,79.75 140.615,79.365 U2.7 ; U9.3 U9.6 ; U2.3 U2.4 149.905,81.905 v1(151,83) ; v1@150.25,79.25 151.75,79.25 156.75,84.25 156.75,122.5 v1(156.25,123)
  Top Layer w0.75: v1(53.5,90.5) 53.5,90.25 53,89.75 53,86.5 53.35,86.15 R10_T1.1 ; v1@53.75,90.5 C7_T1.1 ; v1(54.275,112.475) C3_T1.1@56.5,112.475 ; U3_T1.4@63.05,108.7 v1@66.45,108.7 ; U4_T1.4@63.2,95.7 64.125,96.625 C4_T1.1 v1(67.375,96.625) ; C5_T1.2 66.4,93.4 67.375,94.375 v1(67.375,96.625) ; C10_T1.1 67.175,108.575 v1(66.75,109) 67.75,110 C11_T1.1 ; C21_T1.1 v1(67.375,96.625) ; v1(73.25,90.5) 73.25,90.25 72.75,89.75 72.75,86.5 73.1,86.15 R10_T2.1 ; v1@73.5,90.5 C7_T2.1 ; v1@74.5,113 74.775,112.725 C3_T2.1 C3_T2.1@76,112.475 ; U3_T2.4@82.8,108.7 v1@86.2,108.7 ; U4_T2.4@82.95,95.7 83.875,96.625 C4_T2.1 v1(87.125,96.625) ; C5_T2.2 86.15,93.4 87.125,94.375 v1(87.125,96.625) ; C10_T2.1 86.925,108.575 v1(86.5,109) 87.5,110 C11_T2.1 ; C23.1 89.675,129.625 C22.1 90.55,129.7 91.75,128.5 v1(91.75,128.25) ; C19.1@89,120.125 v1(91.125,120.125) ; C21_T2.1 v1(87.125,96.625) ; v1(93,90.5) 93,90.25 92.5,89.75 92.5,86.5 92.85,86.15 R10_T3.1 ; v1@93.25,90.5 C7_T3.1 ; v1@94.25,113 94.525,112.725 C3_T3.1 C3_T3.1@95.75,112.475 ; U10.4@96.65,125.75 v1(96.65,127.4) ; R24.1 99.575,122.375 C17.1 ; v1(102,120.75) 101.975,120.775 C17.1 ; U3_T3.4@102.55,108.7 v1@105.95,108.7 ; U4_T3.4@102.7,95.7 103.625,96.625 C4_T3.1 v1(106.875,96.625) ; C16.1 C17.1 ; C5_T3.2 105.9,93.4 106.875,94.375 v1(106.875,96.625) ; C10_T3.1 106.675,108.575 v1(106.25,109) 107.25,110 C11_T3.1 ; C21_T3.1 v1(106.875,96.625) ; v1(111.5,120.5) C15.1 C14.1 ; v1(112.75,90.5) 112.75,90.25 112.25,89.75 112.25,86.5 112.6,86.15 R10_T4.1 ; v1@113,90.5 C7_T4.1 ; v1(113.75,113) 114,113 114.275,112.725 C3_T4.1 C3_T4.1@115.5,112.475 ; U3_T4.4@122.3,108.7 v1@125.7,108.7 ; U4_T4.4@122.45,95.7 123.375,96.625 C4_T4.1 v1(126.625,96.625) ; C5_T4.2 125.65,93.4 126.625,94.375 v1(126.625,96.625) ; C10_T4.1 126.425,108.575 v1(126,109) 127,110 C11_T4.1 ; C21_T4.1 v1(126.625,96.625) ; v1(137,80.5) 137.5,80.5 137.875,80.125 C2.1 ; C13.1 147,98.25 148.25,99.5 v1(148.25,100.25) ; C12.1 147,108.75 148.25,107.5 v1(148.25,106.75) ; U1.1 147.875,85.125 C1.1 ; v1@148,100.25 v1(148.25,100.25) ; v1@148.25,100.5 v1(148.25,100.25) ; v1(151,83) C1.1 ; R27.1 150.1,108.6 v1(148.25,106.75) ; C18.1 C1.1 ; R16.1 161.6,81.9 v1(161.75,81.75) 163.5,81.75 164.5,82.75 164.5,85.25 163.54,86.21 U5.2 U5.2@161.96,86.21 ; R18.1 161.6,95.9 v1(161.75,95.75) 163.5,95.75 164.5,96.75 164.5,99.25 163.54,100.21 U6.2 U6.2@161.96,100.21 ; R20.1 161.45,110.05 v1(161.75,109.75) 163.5,109.75 164.5,110.75 164.5,113.25 163.54,114.21 U7.2 U7.2@161.96,114.21 ; v1(159.5,127) R22.1 160.6,128.65 161.04,128.21 U8.2 ; v1(148.25,100.25) 148.25,103.275 U9.6 148.25,103.725 v1(148.25,106.75)
  other v1: 150,79.25 74.25,113 94,113
NetC5_T1_1: C5_T1.1 C6_T1.2 R6_T1.2 U4_T1.3 | length 7.4
  Top Layer w0.5: U4_T1.3 61.635,93.115 C6_T1.2 R6_T1.2@61.9,90.8 ; R6_T1.2 64.55,90.45 C5_T1.1
NetC5_T2_1: C5_T2.1 C6_T2.2 R6_T2.2 U4_T2.3 | length 7.4
  Top Layer w0.5: U4_T2.3 81.385,93.115 C6_T2.2 R6_T2.2@81.65,90.8 ; R6_T2.2 84.3,90.45 C5_T2.1
NetC5_T3_1: C5_T3.1 C6_T3.2 R6_T3.2 U4_T3.3 | length 7.4
  Top Layer w0.5: U4_T3.3 101.135,93.115 C6_T3.2 R6_T3.2@101.4,90.8 ; R6_T3.2 104.05,90.45 C5_T3.1
NetC5_T4_1: C5_T4.1 C6_T4.2 R6_T4.2 U4_T4.3 | length 7.4
  Top Layer w0.5: U4_T4.3 120.885,93.115 C6_T4.2 R6_T4.2@121.15,90.8 ; R6_T4.2 123.8,90.45 C5_T4.1
NetC6_T1_1: C6_T1.1 C7_T1.2 R8_T1.2 U4_T1.2 | length 7.6
  Top Layer w0.5: C7_T1.2 57.45,90.45 R8_T1.2 ; R8_T1.2@60.1,90.6 C6_T1.1 60.365,93.115 U4_T1.2
NetC6_T2_1: C6_T2.1 C7_T2.2 R8_T2.2 U4_T2.2 | length 7.6
  Top Layer w0.5: C7_T2.2 77.2,90.45 R8_T2.2 ; R8_T2.2@79.85,90.6 C6_T2.1 80.115,93.115 U4_T2.2
NetC6_T3_1: C6_T3.1 C7_T3.2 R8_T3.2 U4_T3.2 | length 7.6
  Top Layer w0.5: C7_T3.2 96.95,90.45 R8_T3.2 ; R8_T3.2@99.6,90.6 C6_T3.1 99.865,93.115 U4_T3.2
NetC6_T4_1: C6_T4.1 C7_T4.2 R8_T4.2 U4_T4.2 | length 7.6
  Top Layer w0.5: C7_T4.2 116.7,90.45 R8_T4.2 ; R8_T4.2@119.35,90.6 C6_T4.1 119.615,93.115 U4_T4.2
NetC8_T1_1: C8_T1.1 R13_T1.1 U3_T1.1 U3_T1.2 | length 6.3
  Top Layer w0.5: C8_T1.1 R13_T1.1 57.75,108.25 58.2,108.7 U3_T1.1 U3_T1.2
NetC8_T1_2: C8_T1.2 R11_T1.2 R12_T1.1 | length 5.5
  Top Layer w0.5: C8_T1.2 56.675,103.35 R11_T1.2 R12_T1.1
NetC8_T2_1: C8_T2.1 R13_T2.1 U3_T2.1 U3_T2.2 | length 6.3
  Top Layer w0.5: C8_T2.1 76.25,108.25 77.5,108.25 77.95,108.7 U3_T2.1 U3_T2.2
NetC8_T2_2: C8_T2.2 R11_T2.2 R12_T2.1 | length 5.5
  Top Layer w0.5: C8_T2.2 76.425,103.35 R11_T2.2 R12_T2.1
NetC8_T3_1: C8_T3.1 R13_T3.1 U3_T3.1 U3_T3.2 | length 6.3
  Top Layer w0.5: C8_T3.1@96,106.025 96,108.25 97.25,108.25 97.7,108.7 U3_T3.1 U3_T3.2
NetC8_T3_2: C8_T3.2 R11_T3.2 R12_T3.1 | length 5.5
  Top Layer w0.5: C8_T3.2@96,103.175 96.175,103.35 R11_T3.2 R12_T3.1
NetC8_T4_1: C8_T4.1 R13_T4.1 U3_T4.1 U3_T4.2 | length 6.3
  Top Layer w0.5: C8_T4.1@115.75,106.025 115.75,108.25 117,108.25 117.45,108.7 U3_T4.1 U3_T4.2
NetC8_T4_2: C8_T4.2 R11_T4.2 R12_T4.1 | length 5.5
  Top Layer w0.5: C8_T4.2@115.75,103.175 115.925,103.35 R11_T4.2 R12_T4.1
NetC9_T1_1: C9_T1.1 R25_T1.1 U3_T1.6 U3_T1.7 | length 8.4
  Top Layer w0.5: C9_T1.1 57.175,117 R25_T1.1 60.365,116.965 U3_T1.7 U3_T1.6
NetC9_T1_2: C9_T1.2 R13_T1.2 R14_T1.1 | length 19.8
  Top Layer w0.5: C9_T1.2@54.35,117.1 52.5,115.25 52.5,111.5 53.55,110.45 R13_T1.2 57.2,110.45 57.75,111 R14_T1.1
NetC9_T2_1: C9_T2.1 R25_T2.1 U3_T2.6 U3_T2.7 | length 7.7
  Top Layer w0.5: C9_T2.1 76.925,117 R25_T2.1 79.15,115.85 80.115,114.885 U3_T2.7 U3_T2.6
NetC9_T2_2: C9_T2.2 R13_T2.2 R14_T2.1 | length 19.7
  Top Layer w0.5: v1(72.25,115.5) 72.25,116.75 72.75,117.25 C9_T2.2 ; v1(74.15,110.6) R13_T2.2 77.35,110.6 77.75,111 R14_T2.1
  Bottom Layer w0.5: v1(72.25,115.5) 72.25,112.5 v1(74.15,110.6)
NetC9_T3_1: C9_T3.1 R25_T3.1 U3_T3.6 U3_T3.7 | length 8.4
  Top Layer w0.5: C9_T3.1 96.675,117 R25_T3.1 99.865,116.965 U3_T3.7 U3_T3.6
NetC9_T3_2: C9_T3.2 R13_T3.2 R14_T3.1 | length 19.7
  Top Layer w0.5: v1(92,115.5) 92,116.75 92.5,117.25 C9_T3.2 ; v1(93.9,110.6) R13_T3.2 97.1,110.6 97.5,111 R14_T3.1
  Bottom Layer w0.5: v1(92,115.5) 92,112.5 v1(93.9,110.6)
NetC9_T4_1: C9_T4.1 R25_T4.1 U3_T4.6 U3_T4.7 | length 8.4
  Top Layer w0.5: C9_T4.1 116.425,117 R25_T4.1 119.615,116.965 U3_T4.7 U3_T4.6
NetC9_T4_2: C9_T4.2 R13_T4.2 R14_T4.1 | length 19.7
  Top Layer w0.5: v1(111.75,115.5) 111.75,116.75 112.25,117.25 C9_T4.2 ; v1(113.65,110.6) R13_T4.2 116.85,110.6 117.25,111 R14_T4.1
  Bottom Layer w0.5: v1(111.75,115.5) 111.75,112.5 v1(113.65,110.6)
NetC10_T1_2: C10_T1.2 R12_T1.2 U3_T1.3 | length 5.6
  Top Layer w0.5: U3_T1.3 61.635,105.885 R12_T1.2 64.15,105.85 C10_T1.2@64.25,105.75
NetC10_T2_2: C10_T2.2 R12_T2.2 U3_T2.3 | length 5.6
  Top Layer w0.5: U3_T2.3 81.385,105.885 R12_T2.2 83.9,105.85 C10_T2.2@84,105.75
NetC10_T3_2: C10_T3.2 R12_T3.2 U3_T3.3 | length 5.6
  Top Layer w0.5: U3_T3.3 101.135,105.885 R12_T3.2 103.65,105.85 C10_T3.2@103.75,105.75
NetC10_T4_2: C10_T4.2 R12_T4.2 U3_T4.3 | length 5.6
  Top Layer w0.5: U3_T4.3 120.885,105.885 R12_T4.2 123.4,105.85 C10_T4.2@123.5,105.75
NetC11_T1_2: C11_T1.2 R14_T1.2 U3_T1.5 | length 5
  Top Layer w0.5: U3_T1.5 64,113.5 64.3,113.2 R14_T1.2 67.7,113.2 C11_T1.2
NetC11_T2_2: C11_T2.2 R14_T2.2 U3_T2.5 | length 5
  Top Layer w0.5: U3_T2.5 83.75,113.5 84.05,113.2 R14_T2.2 87.45,113.2 C11_T2.2
NetC11_T3_2: C11_T3.2 R14_T3.2 U3_T3.5 | length 5
  Top Layer w0.5: U3_T3.5 103.5,113.5 103.8,113.2 R14_T3.2 107.2,113.2 C11_T3.2
NetC11_T4_2: C11_T4.2 R14_T4.2 U3_T4.5 | length 5
  Top Layer w0.5: U3_T4.5 123.25,113.5 123.55,113.2 R14_T4.2 126.95,113.2 C11_T4.2
NetC12_2: C12.2 R26.2 U9.1 U9.2 | length 6.1
  Top Layer w0.75: R26.2 141.725,109 C12.2 U9.1 U9.2@141.975,105
NetC16_2: C16.2 C17.2 R23.2 TP8.1 U10.5 U13.5 U13.6 | length 25
  Top Layer w0.5: U10.5 91.85,126.35 94.25,128.75 97.5,128.75 98.05,128.2 R23.2 100.8,128.2 102,127 C17.2@102,123.625 ; C17.2 C16.2 105.375,124.125 106,123.5 U13.5 U13.6 106.8,121.2 TP8.1@108,120
NetC22_2: C22.2 C23.2 J2.1 R28.2 TP7.1 | length 39.3
  Top Layer w0.5: TP7.1 78.75,123.25 79.5,124 79.5,126.25 J2.1 ; v1(85.25,128) 85.375,127.875 C23.2 C22.2@89.675,127.875 ; R28.2 89,126.25 89.75,127 C22.2
  Bottom Layer w0.5: J2.1 v1(85.25,128)
NetD1_2: D1.K R27.2 | length 2
  Top Layer w0.75: D1.K R27.2
NetJ3_10: J3.10 J9.1 R26.1 | length 25.9
  Top Layer w0.75: v1(135.75,109) R26.1
  Bottom Layer w0.75: J9.1 130.5,125.75 135.75,120.5 136.5,120.5 136.5,116.8 J3.10 135.75,110.87 v1(135.75,109)
NetR3_1: R3.1 U2.6 | length 8.2
  Top Layer w0.5: R3.1 135,80.5 136.5,82 139.5,82 140.865,80.635 U2.6
NetR4_1: R4.1 U2.5 | length 11.3
  Top Layer w0.5: R4.1 132.5,81 134.5,83 140.755,83 U2.5
NetR7_T1_1: R7_T1.1 U4_T1.1 | length 3.1
  Top Layer w0.5: R7_T1.1 56.75,96.25 57,96 U4_T1.1@59,96
NetR7_T1_2: R7_T1.2 U4_T1.8 | length 3.2
  Top Layer w0.5: R7_T1.2 56.75,100 57,100.25 U4_T1.8@59,100.25
NetR7_T2_1: R7_T2.1 U4_T2.1 | length 3.1
  Top Layer w0.5: R7_T2.1 76.5,96.25 76.75,96 U4_T2.1@78.75,96
NetR7_T2_2: R7_T2.2 U4_T2.8 | length 2.5
  Top Layer w0.5: R7_T2.2@76.5,99.25 78.45,99.25 U4_T2.8@78.845,99.645
NetR7_T3_1: R7_T3.1 U4_T3.1 | length 3.1
  Top Layer w0.5: R7_T3.1 96.25,96.25 96.5,96 U4_T3.1@98.5,96
NetR7_T3_2: R7_T3.2 U4_T3.8 | length 2.5
  Top Layer w0.5: R7_T3.2 98.2,99.2 U4_T3.8@98.595,99.595
NetR7_T4_1: R7_T4.1 U4_T4.1 | length 3.1
  Top Layer w0.5: R7_T4.1 116,96.25 116.25,96 U4_T4.1@118.25,96
NetR7_T4_2: R7_T4.2 U4_T4.8 | length 3.4
  Top Layer w0.5: R7_T4.2 117.95,99.2 118.345,99.595 U4_T4.8
NetR11_T1_1: R11_T1.1 TP3_T1.1 U4_T1.6 | length 8.6
  Top Layer w0.5: U4_T1.6@61.6,100.535 U4_T1.6 61.635,103.315 R11_T1.1 67.15,103.35 TP3_T1.1
NetR11_T2_1: R11_T2.1 TP3_T2.1 U4_T2.6 | length 8.6
  Top Layer w0.5: U4_T2.6@81.35,100.535 U4_T2.6 81.385,103.315 R11_T2.1 86.9,103.35 TP3_T2.1
NetR11_T3_1: R11_T3.1 TP3_T3.1 U4_T3.6 | length 8.6
  Top Layer w0.5: U4_T3.6@101.1,100.535 U4_T3.6 101.135,103.315 R11_T3.1 106.65,103.35 TP3_T3.1
NetR11_T4_1: R11_T4.1 TP3_T4.1 U4_T4.6 | length 8.7
  Top Layer w0.5: U4_T4.6@120.85,100.535 U4_T4.6 120.885,103.315 R11_T4.1 126.15,103.35 TP3_T4.1@126.5,103
NetR15_2: R15.2 R16.2 U5.1 | length 6.3
  Top Layer w0.5: R16.2 R15.2 ; R15.2@159.5,86.05 159.5,86.45 160.125,87.075 160.825,87.075 U5.1 U5.1@162.4,88.65
NetR17_2: R17.2 R18.2 U6.1 | length 6.3
  Top Layer w0.5: R18.2 R17.2 ; R17.2@159.5,100.05 159.5,100.45 160.125,101.075 160.825,101.075 U6.1 U6.1@162.4,102.65
NetR19_2: R19.2 R20.2 U7.1 | length 6.8
  Top Layer w0.5: R20.2 R19.2 159.5,114.45 160.125,115.075 160.825,115.075 U7.1 U7.1@161.878,116.75
NetR21_2: R21.2 R22.2 U8.1 | length 5.5
  Top Layer w0.5: R21.2 R22.2 162.4,130.85 U8.1
NetR23_1: R23.1 R24.2 U10.3 | length 5
  Top Layer w0.5: U10.3 99.315,124.385 R24.2 R23.1
NetR28_1: R28.1 U10.6 U10.7 | length 4.3
  Top Layer w0.5: R28.1 90.1,123.65 90.635,123.115 U10.7 U10.6
NetTP9_0: TP9.1 U4_T1.5 U4_T2.5 U4_T3.5 U4_T4.5 U10.1 U10.2 | length 172.4
  Top Layer w0.5: U10.1 U10.2
  Top Layer w0.75: U4_T1.5@63.155,100.25 68,100.25 69.75,102 69.75,116.25 72.75,119.25 ; TP9.1@70,119.25 72.75,119.25 ; U4_T2.5@82.905,100.25 87.75,100.25 89.5,102 89.5,118 ; U10.1 96.65,119.35 96.75,119.25 ; U4_T3.5@102.655,100.25 107.5,100.25 109.25,102 109.25,117.75 ; U4_T4.5@122.405,100.25 127.25,100.25 129,102 ; 129,114.5 129,102 ; 72.75,119.25 83.5,119.25 84.75,118 89.5,118 ; 89.5,118 91.5,118 92.75,119.25 96.75,119.25 ; 96.75,119.25 105.5,119.25 107,117.75 109.25,117.75 ; 109.25,117.75 111,117.75 112.5,119.25 125.5,119.25 129,115.75 129,102
OUT+1: J8.1 TVS1.K U5.4 | length 21.9
  Top Layer w1.3: U5.4 170.8,79.7 171.25,79.25 TVS1.K
  Bottom Layer w1.3: TVS1.K 172.75,85 178.25,90.5 J8.1
OUT+2: J8.3 TVS2.K U6.4 | length 15
  Top Layer w1.3: U6.4 170.8,93.7 171.25,93.25 TVS2.K
  Bottom Layer w1.3: TVS2.K 172.75,94.5 178,99.75 J8.3
OUT+3: J8.5 TVS3.K U7.4 | length 11.8
  Top Layer w1.3: U7.4 170.8,107.7 171.25,107.25 TVS3.K
  Bottom Layer w1.3: TVS3.K 177.75,107.25 J8.5
OUT+4: J8.7 TVS4.K U8.4 | length 16.9
  Top Layer w1.3: U8.4 170.8,121.7 171.25,121.25 TVS4.K
  Bottom Layer w1.3: TVS4.K 174.5,121.25 175.75,120 175.75,116.25 J8.7
OUT-1: J8.2 TVS1.A U5.6 | length 32.3
  Top Layer w1.3: TVS1.A 167,79.25 168.25,80.5 168.25,88.25 168.75,88.75 U5.6 v1(173,88.75)
  Bottom Layer w1.3: v1(173,88.75) 173,90 175.5,92.5 175.5,94.25 177.5,96.25 J8.2
OUT-2: J8.4 TVS2.A U6.6 | length 27.7
  Top Layer w1.3: TVS2.A 167,93.25 168.25,94.5 168.25,102.25 168.75,102.75 U6.6 v1(173,102.75)
  Bottom Layer w1.3: v1(173,102.75) 177.75,102.75 J8.4
OUT-3: J8.6 TVS3.A U7.6 | length 30.9
  Top Layer w1.3: TVS3.A 167,107.25 168.25,108.5 168.25,116.25 168.75,116.75 U7.6 v1(173,116.75)
  Bottom Layer w1.3: v1(173,116.75) 173,115.75 178.25,110.5 J8.6
OUT-4: J8.8 TVS4.A U8.6 | length 37.9
  Top Layer w1.3: TVS4.A 167,121.25 168.25,122.5 168.25,130.25 168.75,130.75 U8.6 v1(173,130.75)
  Bottom Layer w1.3: v1(173,130.75) 173,129 178.25,123.75 J8.8
OUTC1: J1.5 R15.1 | length 64.7
  Top Layer w0.5: R15.1 v1(159.5,89.75)
  Bottom Layer w0.5: J1.5 144.17,128.92 146.25,131 159.75,131 165,125.75 165,95.25 v1(159.5,89.75)
OUTC2: J1.3 R17.1 | length 45.8
  Top Layer w0.5: R17.1 v1(159.5,103.75)
  Bottom Layer w0.5: J1.3 146.71,129.21 147.5,130 159.25,130 164,125.25 164,108.25 v1(159.5,103.75)
OUTC3: J1.4 R19.1 | length 17.7
  Top Layer w0.5: R19.1 v1(159.5,117.75) v1@159.5,118
  Bottom Layer w0.5: J1.4 151.17,121 156.25,121 v1(159.5,117.75)
OUTC4: J1.6 R21.1 | length 22.8
  Top Layer w0.5: v1(144.25,121) 149.75,121 151.5,122.75 151.5,126.75 153.4,128.65 R21.1
  Bottom Layer w0.5: J1.6 144.17,121.08 v1(144.25,121)
SCL: J1.2 R1.1 TP1.1 U1.4 U2.1 | length 83.7
  Top Layer w0.5: U2.1 146.695,78.05 152.3,78.05 157.75,83.5 157.75,124.75 v1(157.5,125) ; R1.1 152.65,97.75 TP1.1
  Bottom Layer w0.5: U1.4@147.75,92.37 148.37,92.37 148.75,92.75 153.75,92.75 ; J1.2@149.29,125.5 J1.2 149.71,125 v1(157.5,125) ; TP1.1@153.75,98 TP1.1 153.75,92.75 ; v1(158.5,91.25) 157,92.75 153.75,92.75
SDA: J1.1 R2.1 TP2.1 U1.3 U2.2 | length 73.9
  Top Layer w0.5: U2.2@145.65,79.365 U2.2@146.865,79.365 ; U2.2 148.115,79.365 149.5,80.75 151.5,80.75 155.75,85 155.75,88.5 ; U1.3@147.75,89.83 148.42,89.83 149.75,88.5 151.25,88.5 ; R2.1@151.25,89.9 151.25,88.5 ; TP2.1 155.5,90.25 155.75,90.5 ; v1(155.5,126.75) 155.5,124.25 154.75,123.5 154.75,122.5 155.75,121.5 155.75,90.5 ; 151.25,88.5 155.75,88.5 ; 155.75,88.5 155.75,90.5
  Bottom Layer w0.5: J1.1 154,128 155.25,126.75 v1(155.5,126.75)
TC+1: J4.2 R5_T1.1 R6_T1.1 | length 9.2
  Top Layer w0.5: v1(62.25,86.25) R6_T1.1 R5_T1.1@64.5,88.25
  Bottom Layer w0.5: J4.2@62.25,81.25 v1(62.25,86.25)
TC+2: J5.2 R5_T2.1 R6_T2.1 | length 9.2
  Top Layer w0.5: v1(82,86.25) R6_T2.1 R5_T2.1@84.25,88.25
  Bottom Layer w0.5: J5.2@82,81.25 v1(82,86.25)
TC+3: J6.2 R5_T3.1 R6_T3.1 | length 9.2
  Top Layer w0.5: v1(101.75,86.25) R6_T3.1 R5_T3.1@104,88.25
  Bottom Layer w0.5: J6.2@101.75,81.25 v1(101.75,86.25)
TC+4: J7.2 R5_T4.1 R6_T4.1 | length 9.2
  Top Layer w0.5: v1(121.5,86.25) R6_T4.1 R5_T4.1@123.75,88.25
  Bottom Layer w0.5: J7.2@121.5,81.25 v1(121.5,86.25)
TC-1: J4.1 R8_T1.1 R9_T1.1 R10_T1.2 | length 12.2
  Top Layer w0.5: R10_T1.2 R9_T1.1 ; R9_T1.1@57.5,88.25 R8_T1.1 v1(59.75,86.25)
  Bottom Layer w0.5: J4.1 59.75,81.5 v1(59.75,86.25)
TC-2: J5.1 R8_T2.1 R9_T2.1 R10_T2.2 | length 12.2
  Top Layer w0.5: R10_T2.2 R9_T2.1 ; R9_T2.1@77.25,88.25 R8_T2.1 v1(79.5,86.25)
  Bottom Layer w0.5: J5.1 79.5,81.5 v1(79.5,86.25)
TC-3: J6.1 R8_T3.1 R9_T3.1 R10_T3.2 | length 12.2
  Top Layer w0.5: R10_T3.2 R9_T3.1 ; R9_T3.1@97,88.25 R8_T3.1 v1(99.25,86.25)
  Bottom Layer w0.5: J6.1 99.25,81.5 v1(99.25,86.25)
TC-4: J7.1 R8_T4.1 R9_T4.1 R10_T4.2 | length 12.2
  Top Layer w0.5: R10_T4.2 R9_T4.1 ; R9_T4.1@116.75,88.25 R8_T4.1 v1(119,86.25)
  Bottom Layer w0.5: J7.1 119,81.5 v1(119,86.25)
TEMP1: J2.4 R25_T1.2 TP4_T1.1 | length 18.9
  Top Layer w0.5: R25_T1.2 v1(64.75,117) 66.5,117 TP4_T1.1
  Bottom Layer w0.5: v1(64.75,117) 70.75,123 72.75,123 J2.4
TEMP2: J2.2 R25_T2.2 TP4_T2.1 | length 16
  Top Layer w0.5: R25_T2.2 83,117 84.5,115.5 TP4_T2.1
  Bottom Layer w0.5: J2.2@77.895,125.605 77.895,125.355 83,120.25 v1(83,116.75)
TEMP3: J2.3 R25_T3.2 TP4_T3.1 | length 48.3
  Top Layer w0.5: R25_T3.2 103.25,117 v1(104,117.75) 104,116.5 TP4_T3.1
  Bottom Layer w0.5: J2.3 75.21,129.71 76.75,131.25 102,131.25 104,129.25 v1(104,117.75)
TEMP4: J2.5 R25_T4.2 TP4_T4.1 | length 65.5
  Top Layer w0.5: R25_T4.2 123.25,117 v1(123.75,117.5) 124.25,117 TP4_T4.1
  Bottom Layer w0.5: J2.5 72.67,129.67 75.3,132.3 110.95,132.3 123.75,119.5 v1(123.75,117.5)
pads on no net: J1.7 J1.8 J1.10 J2.7 J2.8 J2.10 J3.1 J3.2 J3.3 J3.4 J3.5 J3.6 J3.7 J3.8 U1.5 U1.6 U1.7 U1.8 U5.3 U5.5 U6.3 U6.5 U7.3 U7.5 U8.3 U8.5

## Polygon pours and split planes (outlines as drawn)
GND on Bottom Layer "Bottom Layer-GND" (solid, remove dead copper, pour order 4): 49,74.75 182.5,74.75 186.5,78.75 186.75,79 186.75,138.25 48.5,138.25 47,139.75

## Keep-outs
Keep-Out Layer:
  the board outline again, w0.3

## Other copper
Top Layer:
  text "-" at 126.5,131.25 h1.52
  text "+" at 130,131.25 h1.52
  text "5V DC" at 117.25,131 h1.52
  text "J2" at 59,129.5 h1.52
  text "REF" at 106.5,127.25 h1.52
  text "VC" at 173,127.25 h1.52
  text "sensor" at 173,125.5 h1.52
  text "R_ADC" at 53.5,125.25 h1.52
  text "board" at 173,123.25 h1.52
  text "J1" at 131.25,121.5 h1.52
  text "." at 109.75,121.25 h1.52
  text "." at 98.25,120.5 h1.52
  text "GND" at 53.5,119.5 h1.52
  text "R_INA" at 61.5,119.5 h1.52
  text "J3" at 130.75,118.25 h1.52
  text "2" at 87.5,114.75 h1.52
  text "3" at 107,114.75 h1.52
  text "4" at 126,114.5 h1.52
  text "4" at 173.75,114.5 h1.52 r90
  text "1" at 65,114.25 h1.52
  text "Rev. 1, 2014" at 52,109.25 h1.52 r270
  text "3" at 173.75,108.75 h1.52 r90
  text "." at 58,107 h1.52
  text "." at 77.75,107 h1.52
  text "." at 97.5,107 h1.52
  text "." at 117.25,107 h1.52
  text "." at 140.25,107 h1.52
  text "GND" at 154.5,106.75 h1.52 r90
  text "3.3V" at 134.5,102.75 h1.52
  text "5" at 64.25,102.25 h1.52 r270.41
  text "6" at 84,102.25 h1.52 r270.41
  text "7" at 103.75,102.25 h1.52 r270.41
  text "8" at 123.5,102.25 h1.52 r270.41
  text "2" at 173.75,100.5 h1.52 r90
  text "SCL" at 154.75,99.5 h1.52 r90
  text "1" at 173.75,94.75 h1.52 r90
  text "." at 58,94 h1.52
  text "." at 77.75,94 h1.52
  text "." at 97.5,94 h1.52
  text "." at 117.25,94 h1.52
  text "SDA" at 154.75,92 h1.52 r90
  text "Logic" at 175,88 h1.52
  text "outputs" at 172.25,86.25 h1.52
  text "TC2" at 85.5,79.5 h1.52
  text "TC3" at 105.25,79.5 h1.52
  text "-" at 55.25,77.5 h1.52
  text "+" at 65.75,77.5 h1.52
  text "TC1" at 67.5,77.5 h1.52
  text "-" at 75,77.5 h1.52
  text "+" at 85.5,77.5 h1.52
  text "-" at 94.75,77.5 h1.52
  text "+" at 105.25,77.5 h1.52
  text "-" at 114.5,77.5 h1.52
  text "+" at 125,77.5 h1.52
  text "TC4" at 126.5,77.5 h1.52
  text "." at 144.5,77.5 h1.52

## Silkscreen, mask and mechanical layers (free items; w line width, h text height)
Mechanical 15:
  lines w0.05: 51.5,127 57,127 57,132.5 51.5,132.5 51.5,127 ; 67,79.75 72.5,79.75 72.5,85.25 67,85.25 67,79.75 ; 118.5,125 118.5,130.5 124,130.5 124,125 118.5,125 ; 125.25,80 130.75,80 130.75,85.5 125.25,85.5 125.25,80 ; 176,77.5 176,83 181.5,83 181.5,77.5 176,77.5 ; 176,127 176,132.5 181.5,132.5 181.5,127 176,127

## Dimensions
51,77 to 51,133 on Mechanical 1
51,77 to 182,77 on Mechanical 1